# EAGLE board led_board_robot_vs_v2 (EAGLE 8.0.1)
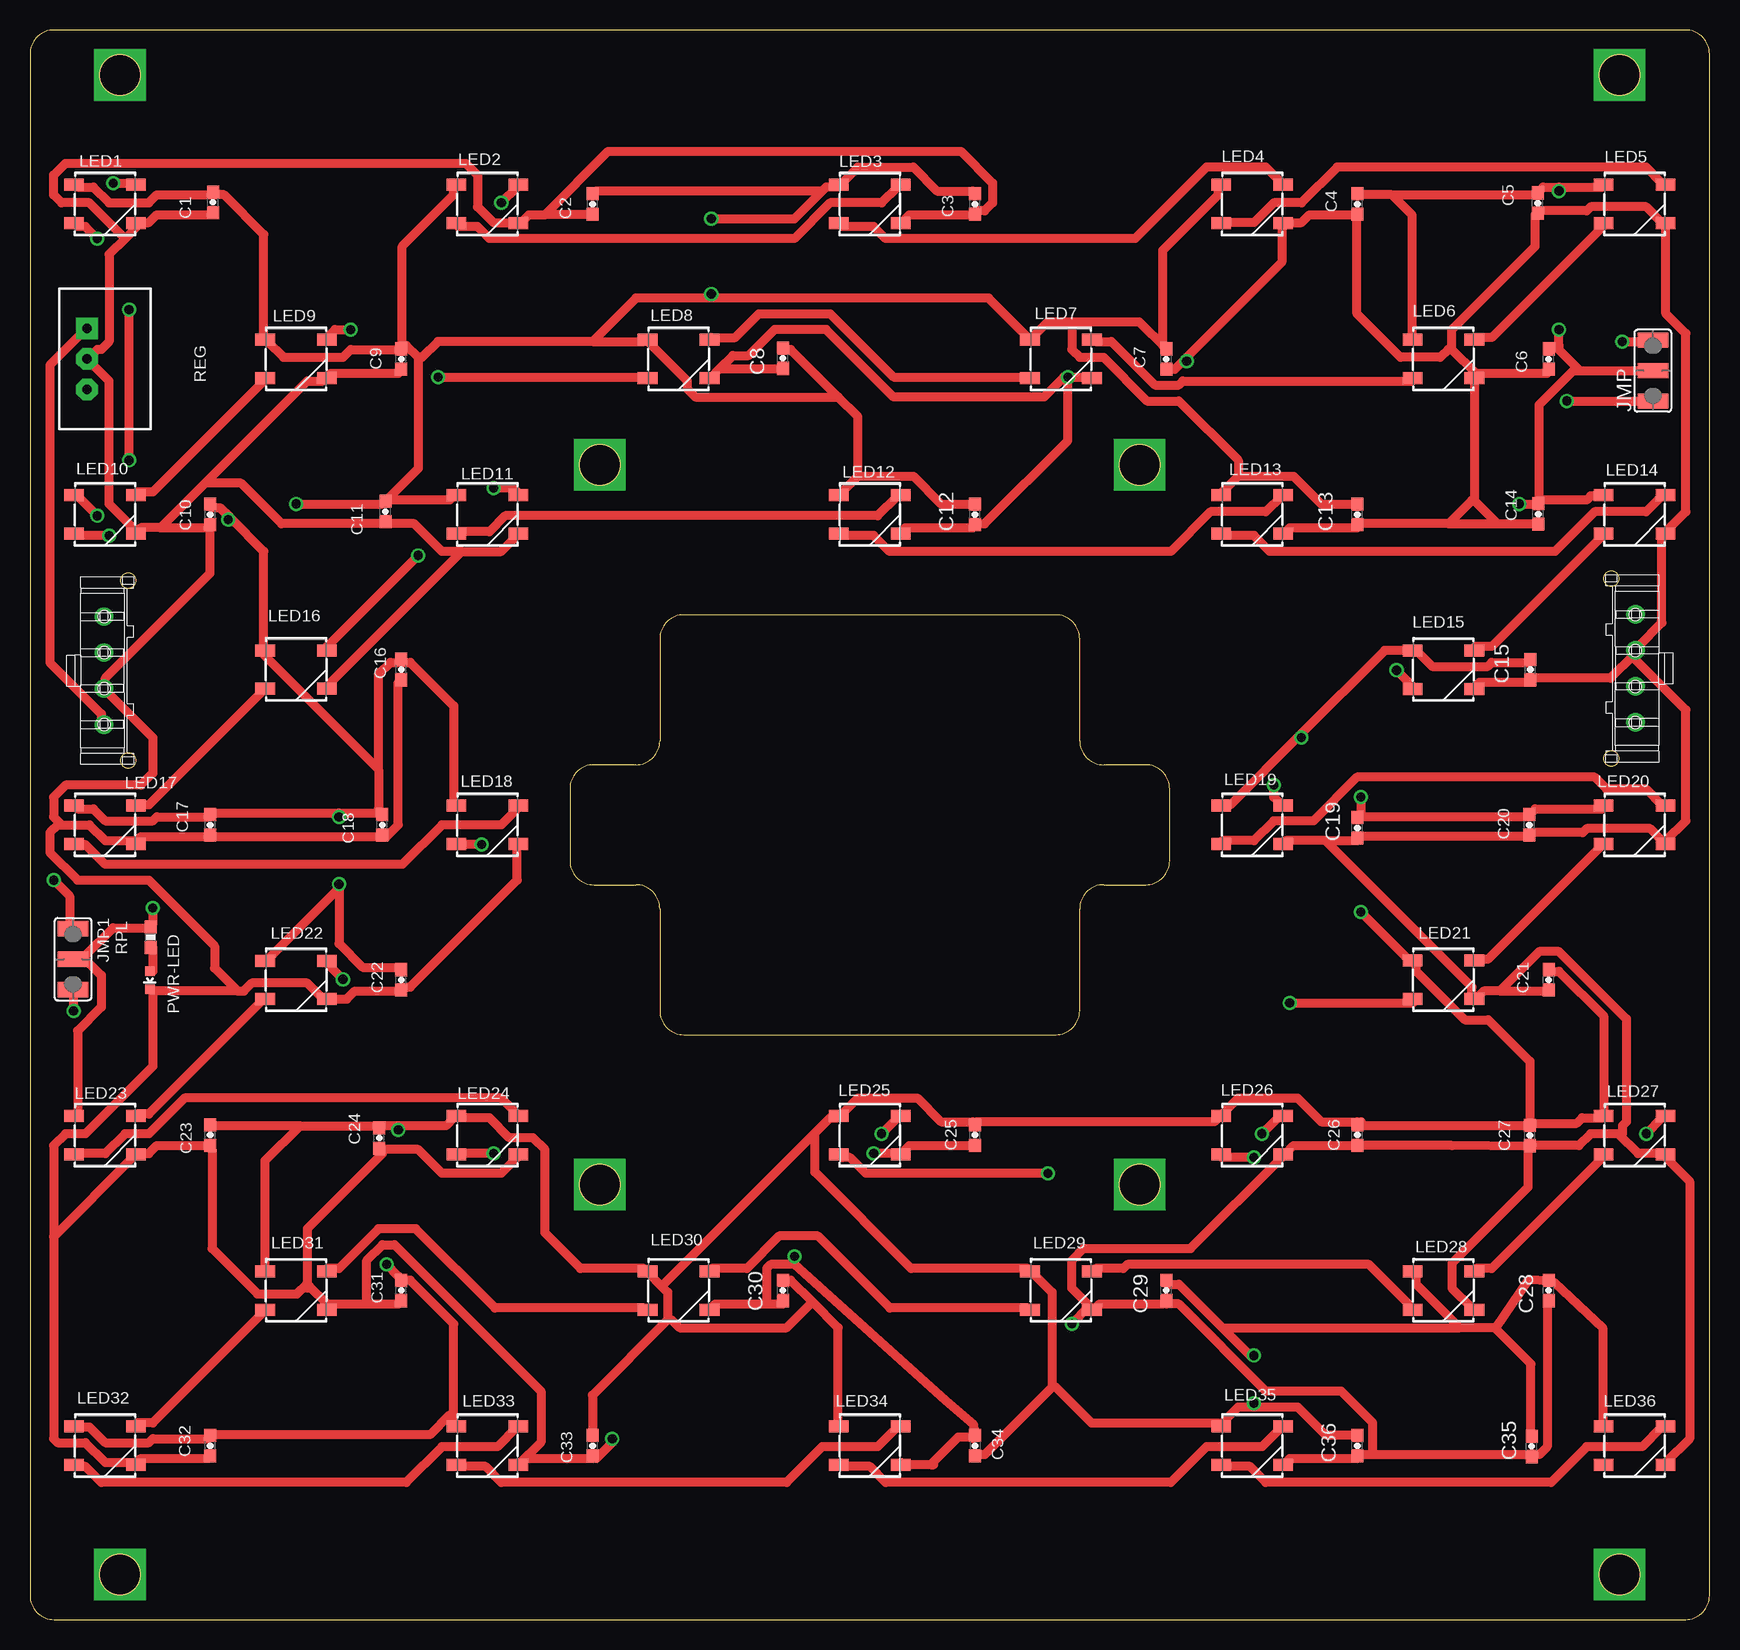
[diagram p0: board, top side]
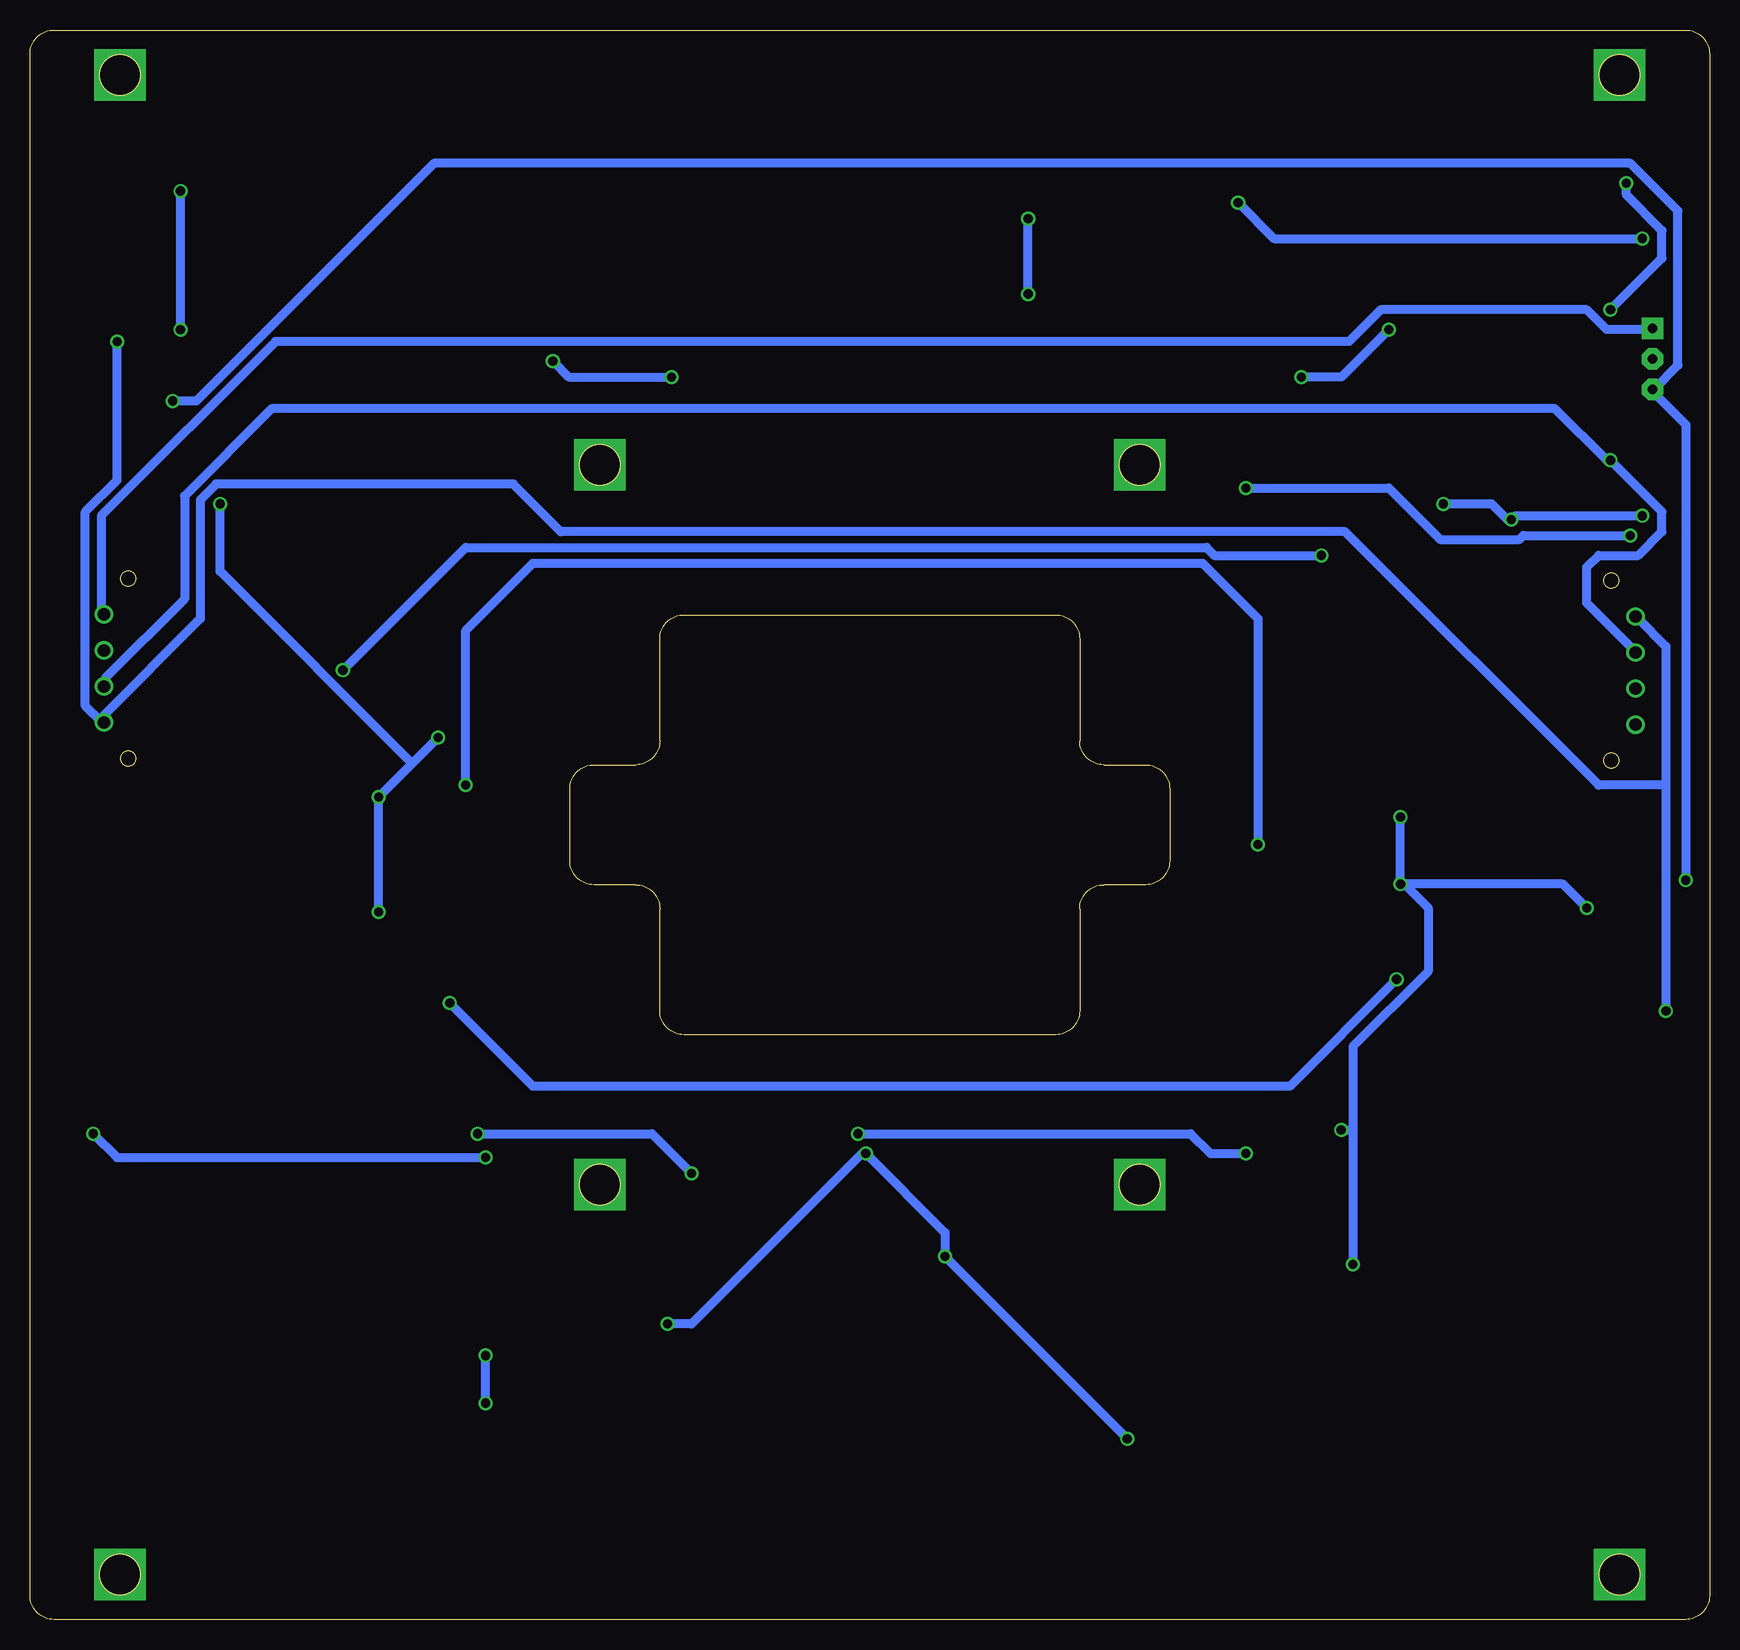
[diagram p1: board, bottom side, seen from below]

Size 140 x 132.5 mm. Coordinates in mm from the lower left corner, seen from the top.
Outline: 2,0 138,0 arc90 140,2 140,130.5 arc90 138,132.5 2,132.5 arc90 0,130.5 0,2 arc90 2,0
Outline: 52.5,59.25 52.5,50.75 arc90 54.5,48.75 85.5,48.75 arc90 87.5,50.75 87.5,59.25 arc-90 89.5,61.25 93,61.25 arc90 95,63.25 95,69.25 arc90 93,71.25 89.5,71.25 arc-90 87.5,73.25 87.5,81.75 arc90 85.5,83.75 54.5,83.75 arc90 52.5,81.75 52.5,73.25 arc-90 50.5,71.25 47,71.25 arc90 45,69.25 45,63.25 arc90 47,61.25 50.5,61.25 arc-90 52.5,59.25
Outline: circle at 132.5,128.75 radius 1.7
Outline: circle at 7.5,3.75 radius 1.7
Outline: circle at 7.5,128.75 radius 1.7
Outline: circle at 132.5,3.75 radius 1.7
Outline: circle at 47.5,96.25 radius 1.7
Outline: circle at 47.5,36.25 radius 1.7
Outline: circle at 92.5,96.25 radius 1.7
Outline: circle at 92.5,36.25 radius 1.7
Outline: circle at 47.5,96.25 radius 1.7
Outline: circle at 92.5,36.25 radius 1.7
Outline: circle at 92.5,96.25 radius 1.7
Outline: circle at 47.5,36.25 radius 1.7
Copper layers (1*16): Top 0.035mm / dielectric 1.5mm / Bottom 0.035mm
Design rules "default": minimum track width 10mil, minimum drill 24mil, track to track 8mil, track to pad 8mil, pad to pad 8mil, via to via 8mil, smd to smd 8mil, copper to edge 40mil, drill to drill 8mil, minimum pad ring 10mil, minimum via ring 8mil, stop-mask expansion 4mil, vias tented up to drill 0mil, thermal gap 10mil
Net classes: 0 default: width 0.762 mm, drill 0.762 mm, clearance 0.559 mm; 1 power: width 0.762 mm, drill 0.762 mm, clearance 0.381 mm; 2 Massa: width 0.8 mm, drill 0.6 mm, clearance 0.2 mm; 3 Mot: width 1.2 mm, drill 0.8 mm, clearance 0.005 mm; 4 motor: width 0.305 mm, drill 0.406 mm, clearance 0.203 mm
tRestrict: area 42.6,44.9 to 97.7,87.6; area 43.6,32.2 to 51.7,40.1; area 88.5,32.2 to 96.7,40.1; area 88.5,92.2 to 96.7,100; area 43.6,92.4 to 51.7,100.3
bRestrict: area 42.6,44.9 to 97.7,87.6; area 43.6,32.2 to 51.7,40.1; area 88.5,32.2 to 96.7,40.1; area 88.5,92.2 to 96.7,100; area 43.6,92.4 to 51.7,100.3

## Footprints (pad centres in the part's own frame; a part is rotated, then mirrored left to right if it is on the bottom)
0603-CAP = smd 1.1 x 1: 1 -0.85,0; 2 0.85,0
MOLEX_LOCKING_4PIN = drill 1.02: 1 -4.593,0.08; 2 -1.591,0.08; 3 1.41,0.08; 4 4.412,0.08
SJ_2W = smd 1.27 x 2.54: 1 -2.54,0; 2 0,0; 3 2.54,0
WS2812B = smd 1.651 x 1: 1 -2.577,1.6; 2 -2.577,-1.6; 3 2.577,-1.6; 4 2.577,1.6
LED-0603 = smd 0.8 x 0.8: A 0,-0.75; C 0,0.75
TSR-1 = drill 0.8 pad 1.8 square: 1 -2.54,-1.5 | drill 0.8 pad 1.8 octagon: 2 0,-1.5; 3 2.54,-1.5
0603-RES = smd 1.1 x 1: 1 -0.85,0; 2 0.85,0

## Placement (x,y rotation side)
C1  0.1uF  [0603-CAP]  15.25,118.13 90 top
C2  0.1uF  [0603-CAP]  46.9,118 90 top
C3  0.1uF  [0603-CAP]  78.77,118 90 top
C4  0.1uF  [0603-CAP]  110.64,118 90 top
C5  0.1uF  [0603-CAP]  125.68,118.07 90 top
C6  0.1uF  [0603-CAP]  126.59,105.07 90 top
C7  0.1uF  [0603-CAP]  94.71,105.07 90 top
C8  0.1uF  [0603-CAP]  62.76,105.14 90 top
C9  0.1uF  [0603-CAP]  30.95,105.07 90 top
C10  0.1uF  [0603-CAP]  15.02,92.12 90 top
C11  0.1uF  [0603-CAP]  29.63,92.37 90 top
C12  0.1uF  [0603-CAP]  78.77,92.12 90 top
C13  0.1uF  [0603-CAP]  110.64,92.12 90 top
C14  0.1uF  [0603-CAP]  125.72,92.16 90 top
C15  0.1uF  [0603-CAP]  125.07,79.18 90 top
C16  0.1uF  [0603-CAP]  30.95,79.19 90 top
C17  0.1uF  [0603-CAP]  15.02,66.25 90 top
C18  0.1uF  [0603-CAP]  29.37,66.25 90 top
C19  0.1uF  [0603-CAP]  110.64,66 90 top
C20  0.1uF  [0603-CAP]  124.98,66.25 90 top
C21  0.1uF  [0603-CAP]  126.59,53.32 90 top
C22  0.1uF  [0603-CAP]  30.95,53.32 90 top
C23  0.1uF  [0603-CAP]  15.02,40.38 90 top
C24  0.1uF  [0603-CAP]  29.12,40.13 90 top
C25  0.1uF  [0603-CAP]  78.77,40.38 90 top
C26  0.1uF  [0603-CAP]  110.64,40.38 90 top
C27  0.1uF  [0603-CAP]  125.02,40.35 90 top
C28  0.1uF  [0603-CAP]  126.59,27.43 90 top
C29  0.1uF  [0603-CAP]  94.71,27.43 90 top
C30  0.1uF  [0603-CAP]  62.76,27.43 90 top
C31  0.1uF  [0603-CAP]  30.95,27.43 90 top
C32  0.1uF  [0603-CAP]  15.02,14.5 90 top
C33  0.1uF  [0603-CAP]  46.9,14.5 90 top
C34  0.1uF  [0603-CAP]  78.77,14.5 270 top
C35  0.1uF  [0603-CAP]  125.17,14.43 90 top
C36  0.1uF  [0603-CAP]  110.64,14.5 90 top
CON1  MOLEX_LOCKING_4PIN  [MOLEX_LOCKING_4PIN]  133.75,79.19 270 top
CON2  MOLEX_LOCKING_4PIN  [MOLEX_LOCKING_4PIN]  6.25,79.19 90 top
JMP  [SJ_2W]  135.28,104.1 90 top
JMP1  [SJ_2W]  3.58,55.04 270 top
LED1  WS2812B  [WS2812B]  6.25,118 0 top
LED2  WS2812B  [WS2812B]  38.12,118 0 top
LED3  WS2812B  [WS2812B]  70,118 0 top
LED4  WS2812B  [WS2812B]  101.88,118 0 top
LED5  WS2812B  [WS2812B]  133.75,118 0 top
LED6  WS2812B  [WS2812B]  117.82,105.07 0 top
LED7  WS2812B  [WS2812B]  85.94,105.07 0 top
LED8  WS2812B  [WS2812B]  54.06,105.07 0 top
LED9  WS2812B  [WS2812B]  22.18,105.07 0 top
LED10  WS2812B  [WS2812B]  6.25,92.12 0 top
LED11  WS2812B  [WS2812B]  38.12,92.12 0 top
LED12  WS2812B  [WS2812B]  70,92.12 0 top
LED13  WS2812B  [WS2812B]  101.88,92.12 0 top
LED14  WS2812B  [WS2812B]  133.75,92.12 0 top
LED15  WS2812B  [WS2812B]  117.82,79.18 0 top
LED16  WS2812B  [WS2812B]  22.18,79.19 0 top
LED17  WS2812B  [WS2812B]  6.25,66.25 0 top
LED18  WS2812B  [WS2812B]  38.12,66.25 0 top
LED19  WS2812B  [WS2812B]  101.88,66.25 0 top
LED20  WS2812B  [WS2812B]  133.75,66.25 0 top
LED21  WS2812B  [WS2812B]  117.82,53.32 0 top
LED22  WS2812B  [WS2812B]  22.18,53.31 0 top
LED23  WS2812B  [WS2812B]  6.25,40.38 0 top
LED24  WS2812B  [WS2812B]  38.12,40.38 0 top
LED25  WS2812B  [WS2812B]  70,40.38 0 top
LED26  WS2812B  [WS2812B]  101.88,40.38 0 top
LED27  WS2812B  [WS2812B]  133.75,40.38 0 top
LED28  WS2812B  [WS2812B]  117.82,27.43 0 top
LED29  WS2812B  [WS2812B]  85.94,27.43 0 top
LED30  WS2812B  [WS2812B]  54.06,27.43 0 top
LED31  WS2812B  [WS2812B]  22.18,27.43 0 top
LED32  WS2812B  [WS2812B]  6.25,14.5 0 top
LED33  WS2812B  [WS2812B]  38.12,14.5 0 top
LED34  WS2812B  [WS2812B]  70,14.5 0 top
LED35  WS2812B  [WS2812B]  101.88,14.5 0 top
LED36  WS2812B  [WS2812B]  133.75,14.5 0 top
PWR-LED  Amber  [LED-0603]  10,53.28 180 top
REG  TSR1-2450  [TSR-1]  6.25,105.07 270 top
RPL  1K  [0603-RES]  10.07,56.87 90 top

## Library data of the parts
C1-C36 PWR-LED RPL = SparkFun
CON1 CON2 = molex_connector; PARTNO: 43650-0415
JMP JMP1 = jumper
LED1-LED36 = SparkFun-LED; PROD_ID: DIO-12503
REG = SteelCaveRobotics-Power

## Nets
5V-CONTROLLER [power]: CON1.4 CON2.4 JMP1.3 JMP.3
5V-FROM-CONVERTER [power]: JMP1.1 JMP.1 REG.3
12V-SUPPLY [power]: CON1.1 CON2.1 REG.1
D11_MICRO [power]: CON1.3 CON2.3 LED1.4
DO_1: LED1.2 LED2.4
DO_2 [power]: LED2.2 LED3.4
DO_3 [power]: LED3.2 LED4.4
DO_4 [power]: LED4.2 LED5.4
DO_5 [power]: LED5.2 LED6.4
DO_6 [power]: LED6.2 LED7.4
DO_7 [power]: LED7.2 LED8.4
DO_8: LED8.2 LED9.4
DO_9: LED9.2 LED10.4
DO_10: LED10.2 LED11.4
DO_11 [power]: LED11.2 LED12.4
DO_14 [power]: LED12.2 LED13.4
DO_15 [power]: LED13.2 LED14.4
DO_16 [power]: LED14.2 LED15.4
DO_17 [power]: LED15.2 LED16.4
DO_18 [power]: LED16.2 LED17.4
DO_19: LED17.2 LED18.4
DO_22 [power]: LED18.2 LED19.4
DO_23 [power]: LED19.2 LED20.4
DO_24 [power]: LED20.2 LED21.4
DO_25 [power]: LED21.2 LED22.4
DO_26 [power]: LED22.2 LED23.4
DO_27 [power]: LED23.2 LED24.4
DO_28: LED24.2 LED25.4
DO_29: LED25.2 LED26.4
DO_30: LED26.2 LED27.4
DO_31: LED27.2 LED28.4
DO_32 [power]: LED28.2 LED29.4
DO_33 [power]: LED29.2 LED30.4
DO_34 [power]: LED30.2 LED31.4
DO_35 [power]: LED31.2 LED32.4
DO_36: LED32.2 LED33.4
DO_37: LED33.2 LED34.4
DO_38: LED34.2 LED35.4
DO_39: LED35.2 LED36.4
DO_40 [power]: LED36.2
GND [power]: C1.1 C2.1 C3.1 C4.1 C5.1 C6.1 C7.1 C8.1 C9.1 C10.1 C11.1 C12.1 C13.1 C14.1 C15.1 C16.1 C17.1 C18.1 C19.1 C20.1 C21.1 C22.1 C23.1 C24.1 C25.1 C26.1 C27.1 C28.1 C29.1 C30.1 C31.1 C32.1 C33.1 C34.1 C35.1 C36.1 CON1.2 CON2.2 LED1.3 LED2.3 LED3.3 LED4.3 LED5.3 LED6.3 LED7.3 LED8.3 LED9.3 LED10.3 LED11.3 LED12.3 LED13.3 LED14.3 LED15.3 LED16.3 LED17.3 LED18.3 LED19.3 LED20.3 LED21.3 LED22.3 LED23.3 LED24.3 LED25.3 LED26.3 LED27.3 LED28.3 LED29.3 LED30.3 LED31.3 LED32.3 LED33.3 LED34.3 LED35.3 LED36.3 PWR-LED.C REG.2
N$17: PWR-LED.A RPL.1
VCC [power]: C1.2 C2.2 C3.2 C4.2 C5.2 C6.2 C7.2 C8.2 C9.2 C10.2 C11.2 C12.2 C13.2 C14.2 C15.2 C16.2 C17.2 C18.2 C19.2 C20.2 C21.2 C22.2 C23.2 C24.2 C25.2 C26.2 C27.2 C28.2 C29.2 C30.2 C31.2 C32.2 C33.2 C34.2 C35.2 C36.2 JMP1.2 JMP.2 LED1.1 LED2.1 LED3.1 LED4.1 LED5.1 LED6.1 LED7.1 LED8.1 LED9.1 LED10.1 LED11.1 LED12.1 LED13.1 LED14.1 LED15.1 LED16.1 LED17.1 LED18.1 LED19.1 LED20.1 LED21.1 LED22.1 LED23.1 LED24.1 LED25.1 LED26.1 LED27.1 LED28.1 LED29.1 LED30.1 LED31.1 LED32.1 LED33.1 LED34.1 LED35.1 LED36.1 RPL.2

## Tracks (layer width: path | path; a pad name or v marks a point on that pad's centre or on a via)
5V-CONTROLLER  (via drill 0.76)
  Top 0.762: v132.74,106.53 135.05,106.53 JMP.3 | v3.63,50.73 3.63,52.38 JMP1.3
  Bottom 0.762: v132.74,106.53 132.74,94.98 135.38,92.34 135.38,76.16 134.06,74.84 CON1.4 134.06,75.16 125.8,83.42 125.8,93.33 124.48,94.65 99.72,94.65 95.76,90.69 30.38,90.69 9.24,69.55 3.63,69.55 | 3.63,69.55 3.63,81.11 5.94,83.42 CON2.4 | 3.63,69.55 v3.63,50.73
5V-FROM-CONVERTER  (via drill 0.76)
  Top 0.762: v1.98,61.63 3.3,60.31 3.3,57.66 JMP1.1 | v128.12,101.58 135.05,101.58 JMP.1
  Bottom 0.762: v1.98,61.63 1.98,99.6 4.62,102.24 REG.3 4.62,102.57 2.64,104.55 2.64,117.43 6.6,121.39 106.32,121.39 126.13,101.58 v128.12,101.58
12V-SUPPLY
  Top 0.762: CON2.1 5.94,74.84 5.94,75.5 1.65,79.79 1.65,104.55 4.62,107.53 REG.1
  Bottom 0.762: CON1.1 134.06,84.08 134.06,92.01 119.53,106.53 30.05,106.53 27.4,109.18 10.23,109.18 8.58,107.53 4.95,107.53 REG.1
D11_MICRO  (via drill 0.76)
  Top 0.762: v6.93,119.74 8.58,119.74 LED1.4 | v8.25,96.63 v8.25,109.18
  Bottom 0.762: v6.93,119.74 6.93,118.75 3.96,115.78 3.96,113.47 v8.25,109.18 | CON2.3 6.27,80.78 10.23,84.74 10.23,87.71 9.24,88.7 5.94,88.7 3.96,90.69 3.96,92.34 v8.25,96.63 8.58,96.63 12.88,100.92 119.86,100.92 127.12,93.66 127.12,85.07 133.73,78.47 133.73,77.81 CON1.3
DO_1  (via drill 0.76)
  Top 0.762: v5.61,115.12 4.62,116.11 3.96,116.11 LED1.2 | v39.29,118.09 40.61,119.41 LED2.4
  Bottom 0.762: v5.61,115.12 36.32,115.12 v39.29,118.09
DO_2
  Top 0.762: LED2.2 35.66,116.11 37.31,116.11 38.3,115.12 63.73,115.12 66.7,118.09 70.99,118.09 72.31,119.41 LED3.4
DO_3
  Top 0.762: LED3.2 67.69,116.11 70.33,116.11 71.32,115.12 92.12,115.12 98.07,121.06 103.02,121.06 104.34,119.74 LED4.4
DO_4
  Top 0.762: LED4.2 99.39,116.44 102.03,116.44 103.68,118.09 105.99,118.09 108.96,121.06 134.72,121.06 136.04,119.74 LED5.4
DO_5
  Top 0.762: LED6.4 120.52,106.87 121.84,106.87 131.09,116.11 LED5.2
DO_6
  Top 0.762: LED6.2 115.24,103.23 96.09,103.23 95.76,102.9 93.77,102.9 90.14,106.53 88.82,106.53 LED7.4
DO_7
  Top 0.762: LED7.2 83.21,103.56 71.98,103.56 66.7,108.85 60.75,108.85 58.77,106.87 56.79,106.87 LED8.4
DO_8  (via drill 0.76)
  Top 0.762: v34.01,103.56 51.18,103.56 LED8.2 | v26.74,107.53 25.42,107.53 24.76,106.87 LED9.4
  Bottom 0.762: v34.01,103.56 30.71,103.56 v26.74,107.53
DO_9
  Top 0.762: LED10.4 8.91,93.99 10.23,93.99 19.48,103.23 LED9.2
DO_10  (via drill 0.76)
  Top 0.762: v6.6,90.36 3.96,90.36 LED10.2 | v38.63,94.32 40.28,94.32 40.61,93.99 LED11.4
  Bottom 0.762: v6.6,90.36 15.52,90.36 15.85,90.02 22.45,90.02 26.74,94.32 v38.63,94.32
DO_11
  Top 0.762: LED11.2 35.66,90.69 38.3,90.69 39.62,92.01 70.66,92.01 72.31,93.66 LED12.4
DO_14
  Top 0.762: LED12.2 67.69,90.36 70.33,90.36 71.65,89.03 95.09,89.03 98.4,92.34 103.02,92.34 104.34,93.66 LED13.4
DO_15
  Top 0.762: LED13.2 99.39,90.36 102.03,90.36 103.35,89.03 127.12,89.03 130.43,92.34 134.72,92.34 136.04,93.66 LED14.4
DO_16
  Top 0.762: LED15.4 120.52,81.11 121.84,81.11 131.09,90.36 LED14.2
DO_17  (via drill 0.76)
  Top 0.762: v32.36,88.7 24.76,81.11 LED16.4 | v113.92,79.13 115.24,77.81 LED15.2
  Bottom 0.762: v32.36,88.7 41.27,88.7 41.93,89.36 103.68,89.36 v113.92,79.13
DO_18
  Top 0.762: LED17.4 8.91,67.9 9.9,67.9 19.48,77.48 LED16.2
DO_19
  Top 0.762: LED17.2 3.96,64.6 4.62,64.6 6.27,62.95 31.04,62.95 34.34,66.25 39.29,66.25 40.61,67.57 LED18.4
DO_22  (via drill 0.76)
  Top 0.762: v37.64,64.6 35.66,64.6 LED18.2 | v103.68,69.55 103.68,68.56 104.34,67.9 LED19.4
  Bottom 0.762: v37.64,64.6 37.64,83.42 42.26,88.04 98.07,88.04 103.68,82.43 v103.68,69.55
DO_23
  Top 0.762: LED19.2 99.39,64.93 102.03,64.93 103.68,66.58 106.98,66.58 110.62,70.21 130.43,70.21 131.42,69.22 134.72,69.22 136.04,67.9 LED20.4
DO_24
  Top 0.762: LED21.4 120.52,55.02 121.51,55.02 131.09,64.6 LED20.2
DO_25  (via drill 0.76)
  Top 0.762: v105,51.39 115.24,51.39 LED21.2 | v26.08,53.37 24.76,54.69 LED22.4
  Bottom 0.762: v105,51.39 98.07,44.46 35,44.46 v26.08,53.37
DO_26
  Top 0.762: LED23.4 8.91,42.14 9.9,42.14 19.48,51.72 LED22.2
DO_27
  Top 0.762: LED23.2 3.96,38.84 6.27,38.84 7.92,40.49 9.9,40.49 12.88,43.47 39.29,43.47 40.61,42.14 LED24.4
DO_28  (via drill 0.76)
  Top 0.762: v38.63,38.84 35.66,38.84 LED24.2 | v70.99,40.49 72.31,41.81 LED25.4
  Bottom 0.762: v38.63,38.84 41.6,38.84 43.25,40.49 v70.99,40.49
DO_29  (via drill 0.76)
  Top 0.762: v84.86,37.19 69.67,37.19 68.35,38.51 67.69,38.51 LED25.2 | v102.69,40.49 104.34,42.14 LED26.4
  Bottom 0.762: v84.86,37.19 88.16,40.49 v102.69,40.49
DO_30  (via drill 0.76)
  Top 0.762: v102.03,38.51 99.39,38.51 LED26.2 | v134.72,40.49 136.04,41.81 LED27.4
  Bottom 0.762: v102.03,38.51 132.74,38.51 v134.72,40.49
DO_31
  Top 0.762: LED28.4 120.52,29.27 121.84,29.27 131.09,38.51 LED27.2
DO_32
  Top 0.762: LED29.4 88.82,29.27 91.13,29.27 91.46,29.6 111.6,29.6 115.24,25.97 LED28.2
DO_33
  Top 0.762: LED30.4 56.79,29.27 59.76,29.27 62.46,31.96 65.68,31.96 71.68,25.97 83.21,25.97 LED29.2
DO_34
  Top 0.762: LED31.4 24.76,29.27 25.75,29.27 29.05,32.57 32.15,32.57 38.76,25.97 51.18,25.97 LED30.2
DO_35
  Top 0.762: LED32.4 8.91,16.39 10.23,16.39 19.48,25.63 LED31.2
DO_36
  Top 0.762: LED32.2 3.96,12.76 4.62,12.76 5.94,11.44 31.37,11.44 34.34,14.41 38.96,14.41 40.61,16.06 LED33.4
DO_37
  Top 0.762: LED33.2 35.66,12.76 37.97,12.76 39.29,11.44 63.07,11.44 66.04,14.41 70.66,14.41 72.31,16.06 LED34.4
DO_38
  Top 0.762: LED34.2 67.69,12.76 70,12.76 71.32,11.44 95.09,11.44 98.07,14.41 102.69,14.41 104.34,16.06 LED35.4
DO_39
  Top 0.762: LED35.2 99.39,12.76 101.7,12.76 103.02,11.44 126.79,11.44 129.77,14.41 134.39,14.41 136.04,16.06 LED36.4
GND  (via drill 0.76)
  Top 0.762: LED12.3 72.64,90.69 72.97,91.02 78.59,91.02 C12.1 78.91,91.34 79.58,91.34 86.51,98.28 v86.51,103.56 | 96.25,105.05 104.34,113.14 104.34,116.11 LED4.3 104.67,116.44 105.99,116.44 106.65,117.1 110.62,117.1 C4.1 110.62,116.77 110.62,108.85 114.25,105.21 117.55,105.21 118.21,105.87 118.54,105.87 | 96.25,105.05 95.42,104.22 94.77,104.22 C7.1 | C6.1 126.46,103.89 120.85,103.89 120.52,103.56 LED6.3 | LED13.3 104.67,90.69 105,91.02 110.62,91.02 C13.1 110.94,91.34 118.26,91.34 | 118.26,91.34 122.32,91.34 | 122.32,91.34 125.47,91.34 C14.1 | 120.52,103.23 LED6.3 | 118.54,105.87 118.54,107.53 125.47,114.46 125.47,117.1 C5.1 125.8,117.43 129.77,117.43 130.1,117.76 134.72,117.76 136.04,116.44 LED5.3 136.37,116.11 136.37,108.85 138.02,107.19 138.02,92.34 136.37,90.69 LED14.3 136.04,90.36 136.04,83.09 134.06,81.11 CON1.2 | 118.54,105.87 120.52,103.89 LED6.3 | v86.51,103.56 88.16,103.56 LED7.3 | v96.42,104.88 96.25,105.05 | 132.41,40.49 130.1,40.49 129.11,39.5 125.14,39.5 C27.1 | 132.41,40.49 134.06,38.84 136.04,38.84 LED27.3 136.37,38.51 138.35,36.53 138.35,15.07 136.37,13.09 LED36.3 | LED28.3 120.19,25.97 118.54,27.62 118.54,29.7 124.86,36.02 124.86,39.34 C27.1 | C27.1 124.81,39.43 118.54,39.5 110.94,39.5 C26.1 110.62,39.5 105.33,39.5 104.67,38.84 LED26.3 104.34,38.51 96.75,30.92 87.83,30.92 86.84,29.93 86.84,27.62 88.16,26.3 LED29.3 | LED29.3 88.82,25.97 89.15,26.3 94.44,26.3 C29.1 94.77,26.3 95.76,26.3 103.02,19.03 109.29,19.03 111.94,16.39 111.94,13.75 | LED35.3 104.67,13.09 105,13.42 110.62,13.42 C36.1 110.94,13.75 111.94,13.75 | C28.1 126.46,26.3 126.46,14.41 125.8,13.75 125.47,13.75 C35.1 125.14,13.75 111.94,13.75
  Top 0.762: 61.41,26.3 57.12,26.3 56.79,25.97 LED30.3 | 61.41,26.3 62.74,26.3 C30.1 | 78.59,15.07 C34.1 | 72.64,13.09 LED34.3 75.08,12.91 | 61.41,26.3 61.41,29.27 61.74,29.6 63.73,29.6 | 63.73,29.6 76.35,18.24 78.67,16.21 C34.1 | LED15.3 120.52,77.81 120.85,78.14 124.81,78.14 C15.1 125.14,78.47 131.75,78.47 133.73,80.45 CON1.2 | 122.58,52.38 121.18,52.38 120.52,51.72 LED21.3 120.19,52.05 120.19,52.71 107.97,64.93 | 122.58,52.38 126.46,52.38 C21.1 | C25.1 78.59,39.5 73.3,39.5 72.64,38.84 LED25.3 72.31,38.84 v70.33,38.84 | 107.97,64.93 110.62,64.93 C19.1 110.94,65.26 124.81,65.26 C20.1 125.14,65.59 129.44,65.59 129.77,65.92 135.05,65.92 136.04,64.93 LED20.3 136.37,64.93 138.02,66.58 138.02,75.83 133.73,80.12 CON1.2 | LED19.3 104.67,64.93 107.97,64.93 | v63.73,30.26 63.73,29.6 | v86.84,24.65 88.16,25.97 LED29.3 | 132.41,40.49 132.74,40.49 132.74,41.16 133.07,41.48 133.07,50.07 127.45,55.68 125.8,55.68 122.58,52.46 122.58,52.38 | C32.1 14.86,13.42 9.24,13.42 8.91,13.09 LED32.3 8.58,13.09 6.27,13.09 4.62,14.74 2.31,14.74 1.98,15.07 1.98,31.91 | 1.98,31.91 8.58,38.51 LED23.3 8.91,38.84 9.9,38.84 10.56,39.5 14.86,39.5 C23.1 15.19,39.17 15.19,30.92 18.97,27.13 22.25,27.13 23.06,27.95 23.11,27.95 | 28.06,26.3 25.09,26.3 24.76,25.97 LED31.3 24.76,26.3 23.28,27.78 | 28.06,26.3 30.71,26.3 C31.1 | LED24.3 40.61,38.51 39.29,37.19 34.34,37.19 32.36,39.17 29.38,39.17 C24.1 29.38,38.84 23.11,32.57 23.11,27.95 | 23.11,27.95 23.28,27.78 | 28.06,26.3 28.06,29.93 29.38,31.25 30.38,31.25 42.59,19.03 42.59,14.79 LED33.3 40.94,13.09 41.27,13.42 46.89,13.42 C33.1 47.22,13.42 48.54,14.74 v48.54,15.07
  Top 0.762: 23.11,27.62 23.28,27.78 | LED3.3 72.64,116.44 73.3,117.1 78.59,117.1 C3.1 78.91,117.43 79.58,117.43 80.24,118.09 80.24,119.74 77.59,122.38 48.21,122.38 42.92,117.1 | 42.92,117.1 46.89,117.1 C2.1 | 17.32,52.38 10.23,52.38 | 10.23,52.38 PWR-LED.C | LED18.3 40.61,64.6 40.61,61.63 31.7,52.71 31.04,52.71 C22.1 30.71,52.38 27.07,52.38 26.41,51.72 25.09,51.72 LED22.3 24.43,51.72 23.11,53.04 18.49,53.04 17.83,52.38 17.32,52.38 | C16.1 30.71,78.14 30.71,66.25 29.72,65.26 C18.1 29.05,65.26 15.19,65.26 C17.1 14.86,65.26 9.24,65.26 8.91,64.93 LED17.3 8.58,64.93 6.27,64.93 4.95,66.25 2.64,66.25 | 35.99,89.03 39.29,89.03 40.61,90.36 LED11.3 | 35.99,89.03 34.34,89.03 32.03,91.34 29.72,91.34 C11.1 29.38,91.34 20.98,91.34 17.6,94.72 14.6,94.72 | LED16.3 24.76,77.81 35.99,89.03 | C1.1 15.19,117.1 10.56,117.1 9.9,116.44 8.91,116.44 LED1.3 8.91,116.11 7.92,115.12 | 7.92,115.12 6.6,113.8 6.6,106.53 5.94,105.87 5.61,105.87 4.95,105.21 REG.2 4.95,104.88 6.6,103.23 6.6,93 8.91,90.69 | C9.1 30.71,103.89 25.09,103.89 24.76,103.56 LED9.3 24.43,103.23 23.11,103.23 14.6,94.72 | 10.89,91.02 9.24,91.02 8.91,90.69 | 10.89,91.02 14.86,91.02 C10.1 15.02,87.22 6.27,78.47 6.27,77.81 CON2.2 6.27,77.48 10.23,73.51 10.23,70.54 9.24,69.55 2.97,69.55 1.98,68.56 1.98,66.91 2.64,66.25 | 14.6,94.72 10.89,91.02 | 8.91,90.69 LED10.3 | 2.64,66.25 2.31,66.25 1.65,65.59 1.65,63.94 3.96,61.63 9.9,61.63 15.39,56.14 15.39,54.31 17.32,52.38 | 7.92,115.12 4.95,118.09 2.64,118.09 1.98,118.75 1.98,120.4 2.97,121.39 36.32,121.39 37.31,120.4 37.31,117.76 38.63,116.44 40.61,116.44 LED2.3 40.94,116.44 41.6,117.1 42.92,117.1
  Top 0.762: 10.23,52.38 10.23,46.11 4.62,40.49 2.97,40.49 1.98,39.5 1.98,31.91 | LED6.3 120.4,93.27 | 120.4,93.27 122.32,91.34 | 120.4,93.27 120.19,93.27 118.26,91.34 | 57.45,104.22 62.74,104.22 C8.1 | 57.45,104.22 56.79,103.56 LED8.3 | v86.51,103.56 86.18,103.56 84.53,101.91 71.98,101.91 66.37,107.53 62.08,107.53 59.92,105.37 58.59,105.37 57.45,104.22 | 75.08,12.91 75.33,12.91 | C34.1 78.62,15.2 77.37,15.2 75.08,12.91
  Bottom 0.762: v86.51,103.56 95.09,103.56 v96.42,104.88 | v86.84,24.65 84.86,24.65 70.66,38.84 v70.33,38.84 63.73,32.24 v63.73,30.26 v48.54,15.07
N$1  (via drill 3.3 pad 3.4)
  other vias: 7.5,128.75
N$2  (via drill 3.3)
  other vias: 7.5,3.75
N$3  (via drill 3.3)
  other vias: 132.5,3.75
N$4  (via drill 3.3)
  other vias: 132.5,128.75
N$5  (via drill 3.3 pad 3.4)
  other vias: 47.5,96.25
N$6  (via drill 3.3 pad 3.4)
  other vias: 92.5,36.25
N$7  (via drill 3.3 pad 3.4)
  other vias: 92.5,96.25
N$8  (via drill 3.3 pad 3.4)
  other vias: 47.5,36.25
N$17
  Top 0.762: PWR-LED.A 10.23,54.03 10.23,56.01 RPL.1
VCC  (via drill 0.76)
  Top 0.762: 69.01,95.31 73.63,95.31 75.94,93 78.59,93 C12.2 | 69.01,95.31 67.69,93.99 LED12.1 | 67.36,101.91 63.4,105.87 63.07,105.87 C8.2 | 69.01,95.31 69.01,100.26 67.36,101.91 | LED1.1 3.96,119.41 5.28,119.41 6.6,118.09 9.9,118.09 10.56,118.75 15.19,118.75 C1.2 15.52,118.75 16.18,118.75 19.48,115.45 19.48,106.87 LED9.1 19.81,106.53 21.13,105.21 26.08,105.21 26.74,105.87 30.71,105.87 C9.2 | C11.2 29.72,93.33 35,93.33 35.33,93.66 LED11.1 | LED2.1 35.33,119.41 35.33,118.75 31.04,114.46 31.04,106.2 C9.2 | 32.36,105.21 31.37,106.2 C9.2 | 46.89,106.53 34.01,106.53 32.69,105.21 32.36,105.21 | 46.89,106.53 51.18,106.53 LED8.1 51.51,106.53 54.81,103.23 54.81,102.57 55.47,101.91 67.36,101.91 | 66.04,119.08 47.22,119.08 C2.2 | 66.04,119.08 66.37,119.41 67.36,119.41 LED3.1 67.69,119.74 69.01,121.06 73.63,121.06 75.61,119.08 78.59,119.08 C3.2 | 125.8,93.33 129.77,93.33 130.1,93.66 131.09,93.66 LED14.1 | 125.8,93.33 C14.2 125.47,93 v124.15,93 | 126.79,105.87 C6.2 127.36,105.92 | 135.05,104.22 JMP.2 129.18,104.1 | 125.8,93.33 125.8,101.25 128.65,104.1 129.18,104.1 | 127.45,119.41 126.13,119.41 125.8,119.08 C5.2 125.47,118.75 113.51,118.75 | 127.45,119.41 131.09,119.41 LED5.1 | LED32.1 3.96,16.06 4.95,16.06 6.27,14.74 9.9,14.74 10.23,15.07 14.86,15.07 C32.2 15.19,15.4 33.35,15.4 35,17.05 35.33,17.05 | 35.33,17.05 35.33,16.39 LED33.1 | 35.33,17.05 35.33,24.65 31.7,28.28 31.04,28.28 C31.2 30.71,28.61 v29.72,29.6 | 16.67,91.84 19.48,89.03 19.48,81.11 LED16.1 19.48,80.45 29.05,70.87 | 16.67,91.84 15.85,92.67 15.19,92.67 C10.2 | v5.61,92.01 3.96,93.66 LED10.1 | v16.51,91.67 16.67,91.84
  Top 0.762: LED23.1 3.96,42.14 3.96,49.08 5.94,51.06 5.94,53.7 4.62,55.02 JMP1.2 3.63,55.35 4.62,55.35 6.93,57.66 9.9,57.66 RPL.2 10.23,57.99 v10.23,59.32 | C22.2 30.71,54.36 27.73,54.36 25.75,56.34 v25.75,61.3 25.75,60.97 19.81,55.02 LED22.1 | LED17.1 3.96,67.57 5.28,67.57 6.27,66.58 10.23,66.58 10.56,66.91 14.86,66.91 C17.2 15.19,67.24 25.75,67.24 | 25.75,67.24 29.05,67.24 C18.2 29.05,67.57 29.05,70.87 | 29.05,70.87 29.05,78.8 30.05,79.79 30.71,79.79 C16.2 31.04,79.79 31.7,79.79 35.33,76.16 35.33,67.9 LED18.1 | v25.75,66.91 25.75,67.24 | 30.71,41.16 34.67,41.16 35.33,41.81 LED24.1 35.66,41.81 38.3,41.81 39.95,40.16 41.93,40.16 42.92,39.17 42.92,32.24 45.89,29.27 51.18,29.27 LED30.1 51.51,28.94 52.66,27.78 | 30.71,41.16 29.38,41.16 C24.2 29.05,41.16 22.5,41.16 | 22.5,41.16 15.19,41.16 C23.2 | 19.48,29.27 LED31.1 19.6,38.26 22.5,41.16 | 65.21,26.46 67.36,24.31 67.36,16.39 LED34.1 | 65.21,26.46 63.4,28.28 63.07,28.28 C30.2 | 53.16,24.98 46.89,18.7 46.89,15.4 C33.2 | 53.16,24.98 53.16,27.29 52.66,27.78 | 65.33,40.44 52.66,27.78 | 65.33,40.44 66.7,41.81 67.36,41.81 LED25.1 67.69,42.14 69.01,43.47 73.96,43.47 75.94,41.48 78.59,41.48 C25.2 78.91,41.48 98.73,41.48 99.06,41.81 LED26.1 99.39,42.14 100.71,43.47 105.66,43.47 107.64,41.48 110.62,41.48 C26.2 | 65.21,26.46 63.07,24.31 54.15,24.31 53.49,24.98 53.16,24.98 | LED20.1 131.09,67.57 125.47,67.57 125.14,67.24 C20.2 124.81,66.91 110.94,66.91 C19.2 110.94,67.24 v110.94,68.56 | C15.2 124.81,79.79 121.84,79.79 121.51,79.46 116.89,79.46 115.57,80.78 LED15.1 114.91,80.78 112.93,80.78 105.83,73.68 | 105.83,73.68 100.05,67.9 99.39,67.9 LED19.1
  Top 0.762: v105.99,73.51 105.83,73.68 | 125.14,41.48 C27.2 | C21.2 126.79,54.03 127.45,54.03 131.17,50.31 LED27.1 131.09,41.81 129.38,41.81 128.93,41.36 125.18,41.36 C27.2 | 110.94,41.48 C26.2 | 125.14,15.4 C35.2 125.12,15.33 125.12,21.29 122.17,24.24 122.17,24.31 | 119.2,24.31 115.57,27.95 115.57,28.94 LED28.1 | LED36.1 131.09,16.39 131.09,24.31 127.05,28.1 C28.2 124.94,28.35 122.17,24.31 | 102.03,17.71 100.71,17.71 99.39,16.39 LED35.1 99.06,16.39 88.49,16.39 85.52,19.36 85.19,19.36 | 102.03,17.71 105.66,17.71 107.97,15.4 110.62,15.4 C36.2 | 78.91,13.75 C34.2 79.25,13.75 79.58,13.75 85.19,19.36 | 99.39,24.31 95.76,27.95 94.77,27.95 C29.2 | v110.94,58.99 114.91,55.02 LED21.1 115.57,54.69 115.57,54.03 119.61,49.99 121.56,49.99 125.02,46.53 C27.2 | v30.71,40.83 30.71,41.16 | v22.2,93 29.38,93 C11.2 | 32.36,105.21 32.36,95.95 C11.2 | 99.39,24.31 119.2,24.31 | 65.33,40.44 65.43,40.34 65.43,37.29 73.45,29.27 83.21,29.27 LED29.1 83.54,28.94 85.19,27.29 85.19,19.36 | 46.89,106.53 50.52,110.17 56.79,110.17 | 56.79,110.17 79.91,110.17 83.21,106.87 LED7.1 83.54,106.87 84.86,108.19 86.84,108.19 | 129.18,104.1 127.36,105.92 | 100.71,95.31 105.33,95.31 107.64,93 110.62,93 C13.2 | 100.71,95.31 99.39,93.99 LED13.1 | LED4.1 99.06,119.41 99.06,118.75 94.44,114.13 94.44,106.2 C7.2 92.44,108.19 86.84,108.19 | v56.79,110.5 56.79,110.17 | 100.71,95.31 100.71,96.63 95.76,101.58 93.11,101.58 89.48,105.21 87.5,105.21 86.84,105.87 86.84,108.19 | 113.51,118.75 110.94,118.75 C4.2 | 115.24,106.87 LED6.1 115.21,106.7 115.21,117.05 113.51,118.75 | v127.45,107.53 127.45,106.2 127.36,105.92 | v127.45,119.08 127.45,119.41
  Top 0.762: v102.03,18.04 102.03,17.71 | 99.39,24.31 101.7,22 v102.03,22 | 122.17,24.31 119.2,24.31 | C26.2 110.67,41.2 C27.2 | v56.79,116.77 63.73,116.77 66.04,119.08
  Bottom 0.762: v5.61,92.01 16.18,92.01 v16.51,91.67 16.84,91.67 18.16,93 v22.2,93 | v25.75,61.3 v25.75,66.91 | v25.75,61.3 25.42,61.3 23.44,59.32 23.44,54.03 29.72,47.76 29.72,40.83 | 29.72,40.83 v29.72,29.6 | v105.99,73.51 108.14,71.37 | 108.14,71.37 v110.94,68.56 v110.94,58.99 | v30.71,40.83 29.72,40.83 | v10.23,59.32 12.22,61.3 v25.75,61.3 | v56.79,110.5 v56.79,116.77 | v124.15,93 124.15,87.38 108.14,71.37 | v127.45,107.53 v127.45,119.08 | v102.03,18.04 v102.03,22

## Text on the board
tValues: 12+ | 12+ | _ | _ | ~ | ~ | 5+ | 5+
Document: LED_BOARD_ROBOT_VS_V2 | LED_BOARD_ROBOT_VS_V2